# Altium PCB MiniCNC_ver2.PcbDoc (part 1 of 2)
Units mil, origin at the board's own origin, x right, y up, seen from the top; angles counter-clockwise.
Board outline 3937.01 x 3740 mil, 2 copper layers (Top Layer, Bottom Layer); 116 components, 92 nets, 444 pads, 109 vias.
Unrouted connection lines stored in the file: 92.
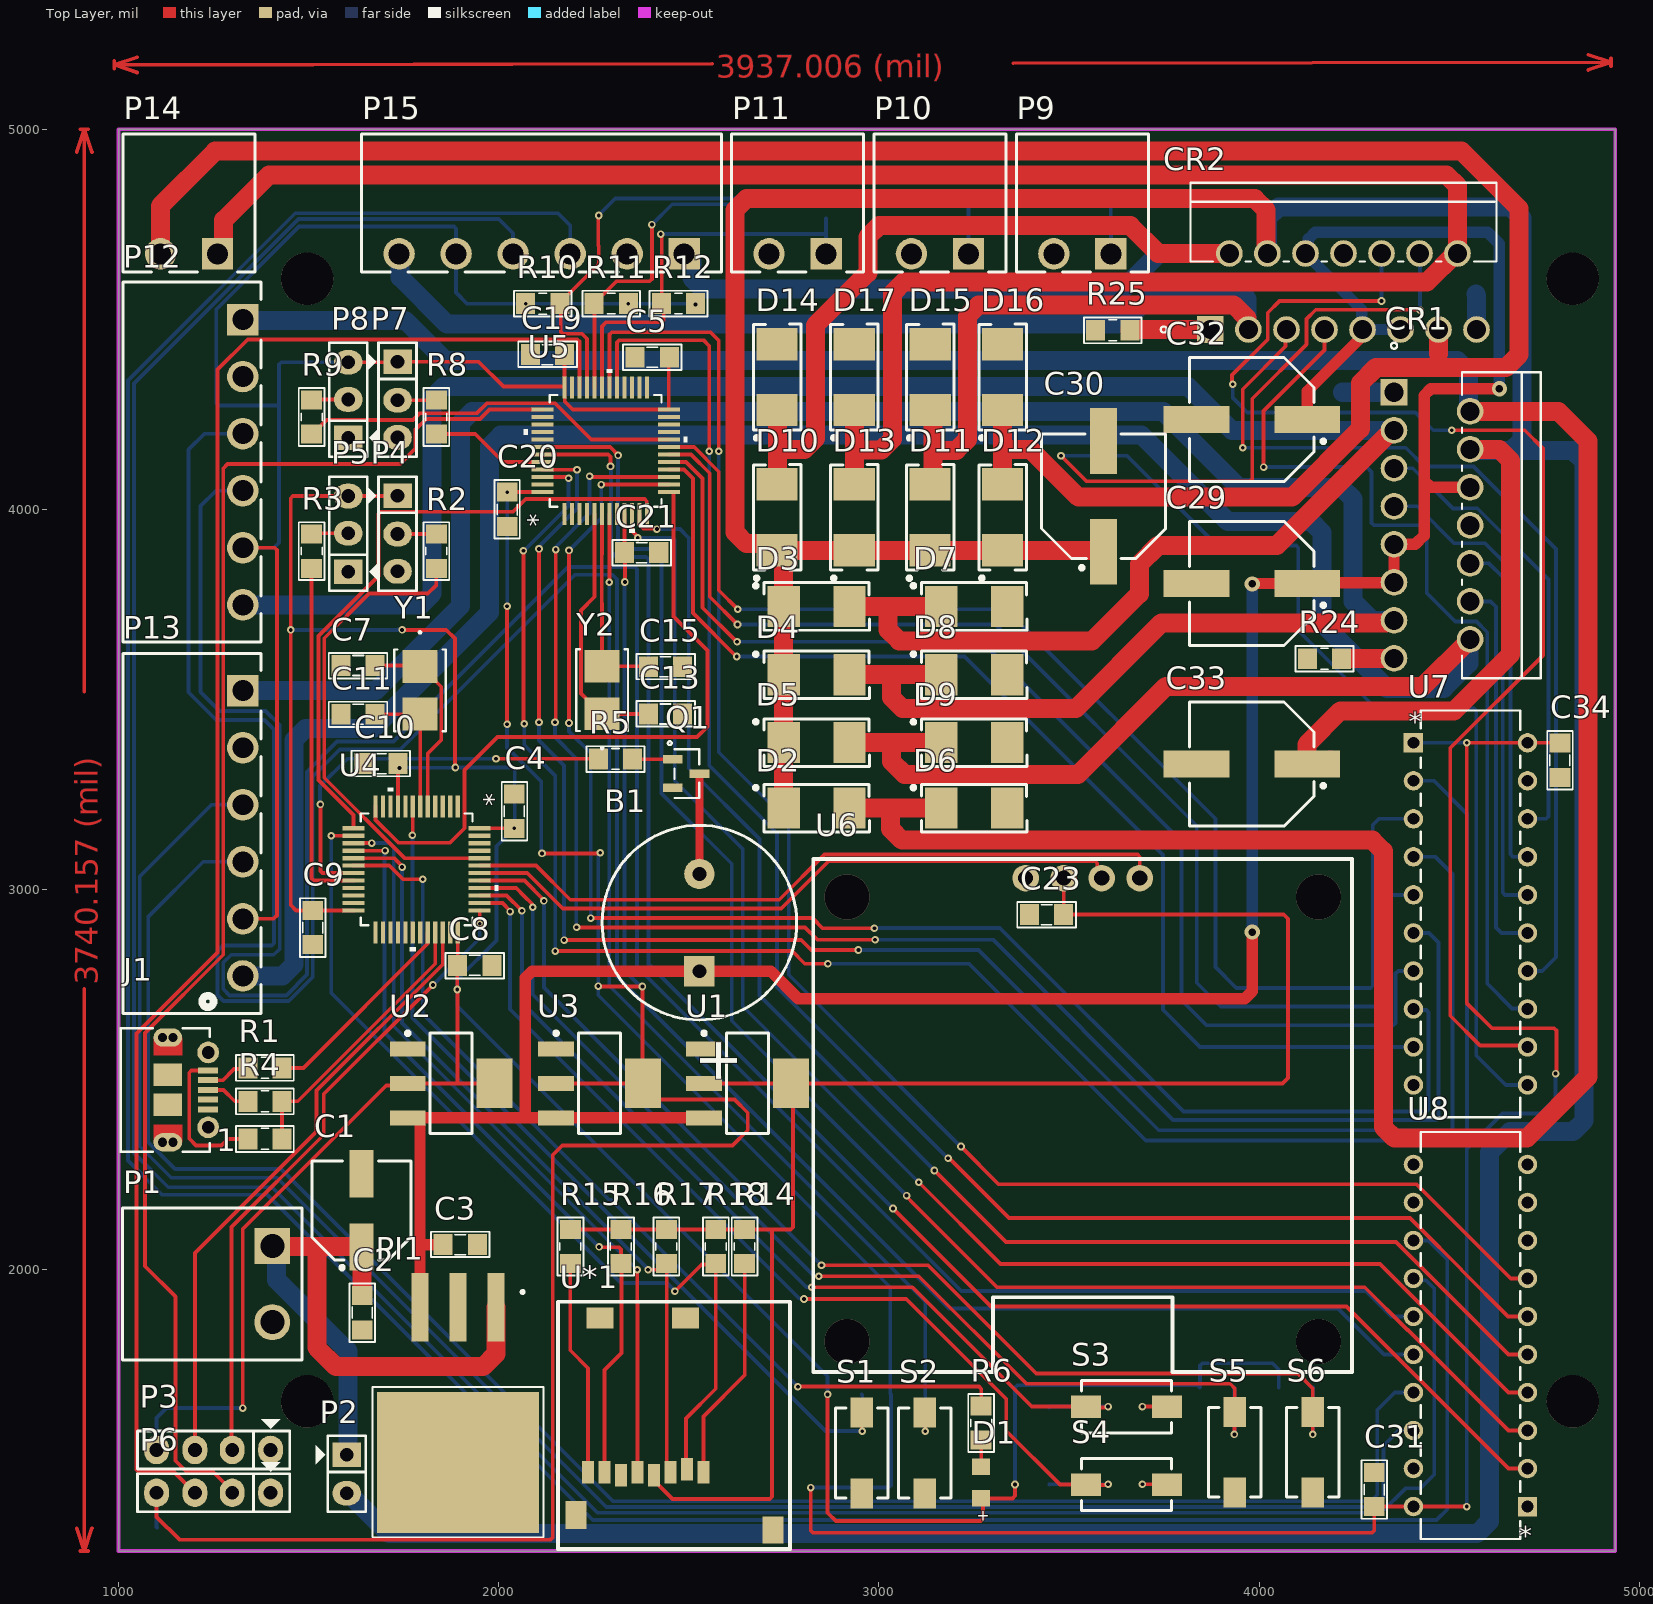
[diagram p0: Top Layer view]
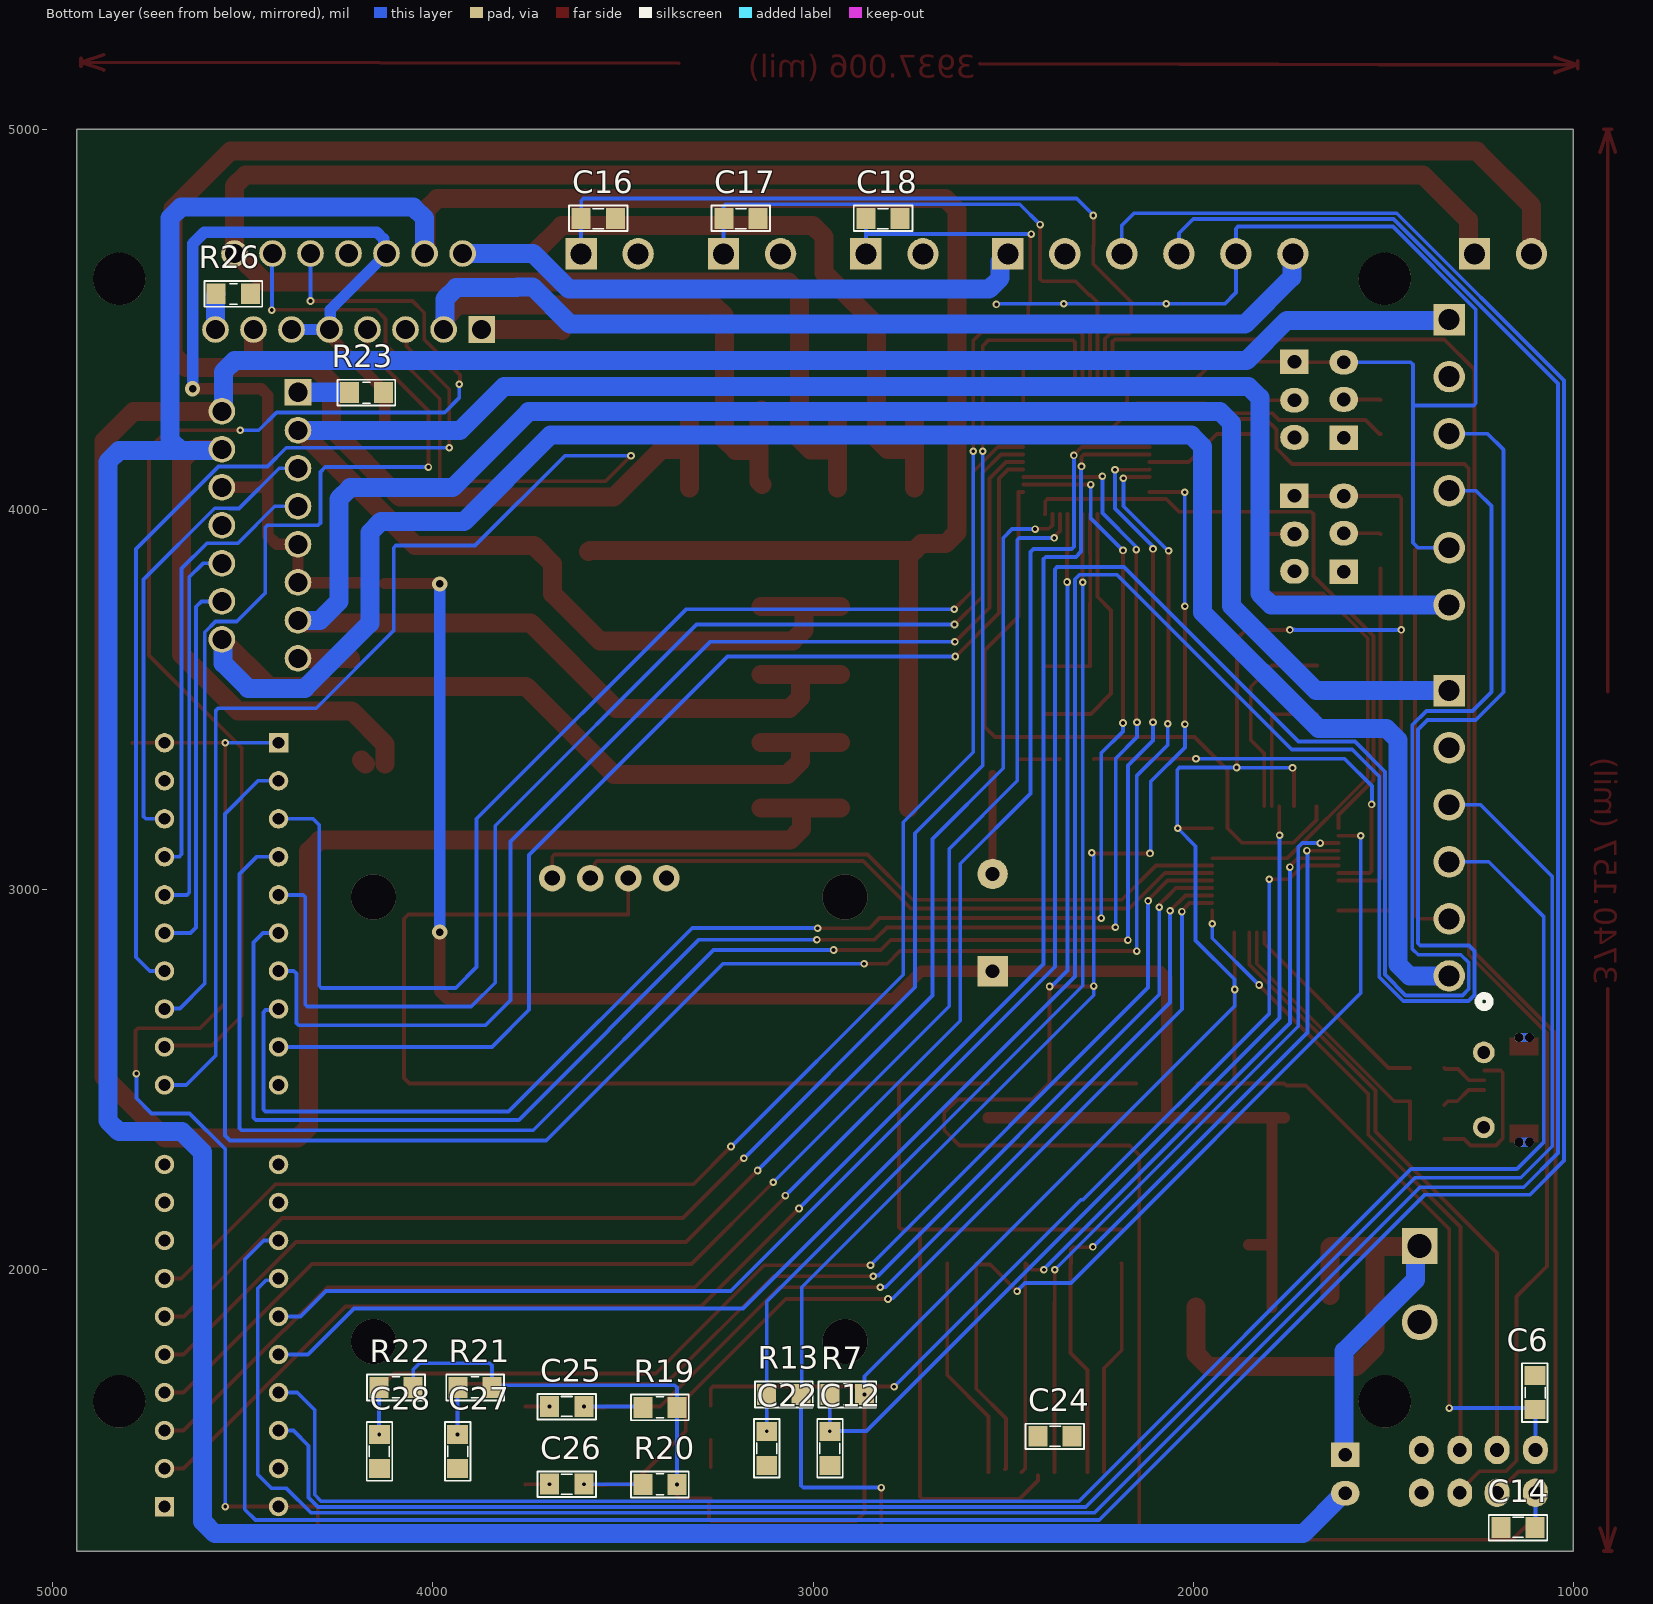
[diagram p1: Bottom Layer view, seen from below]
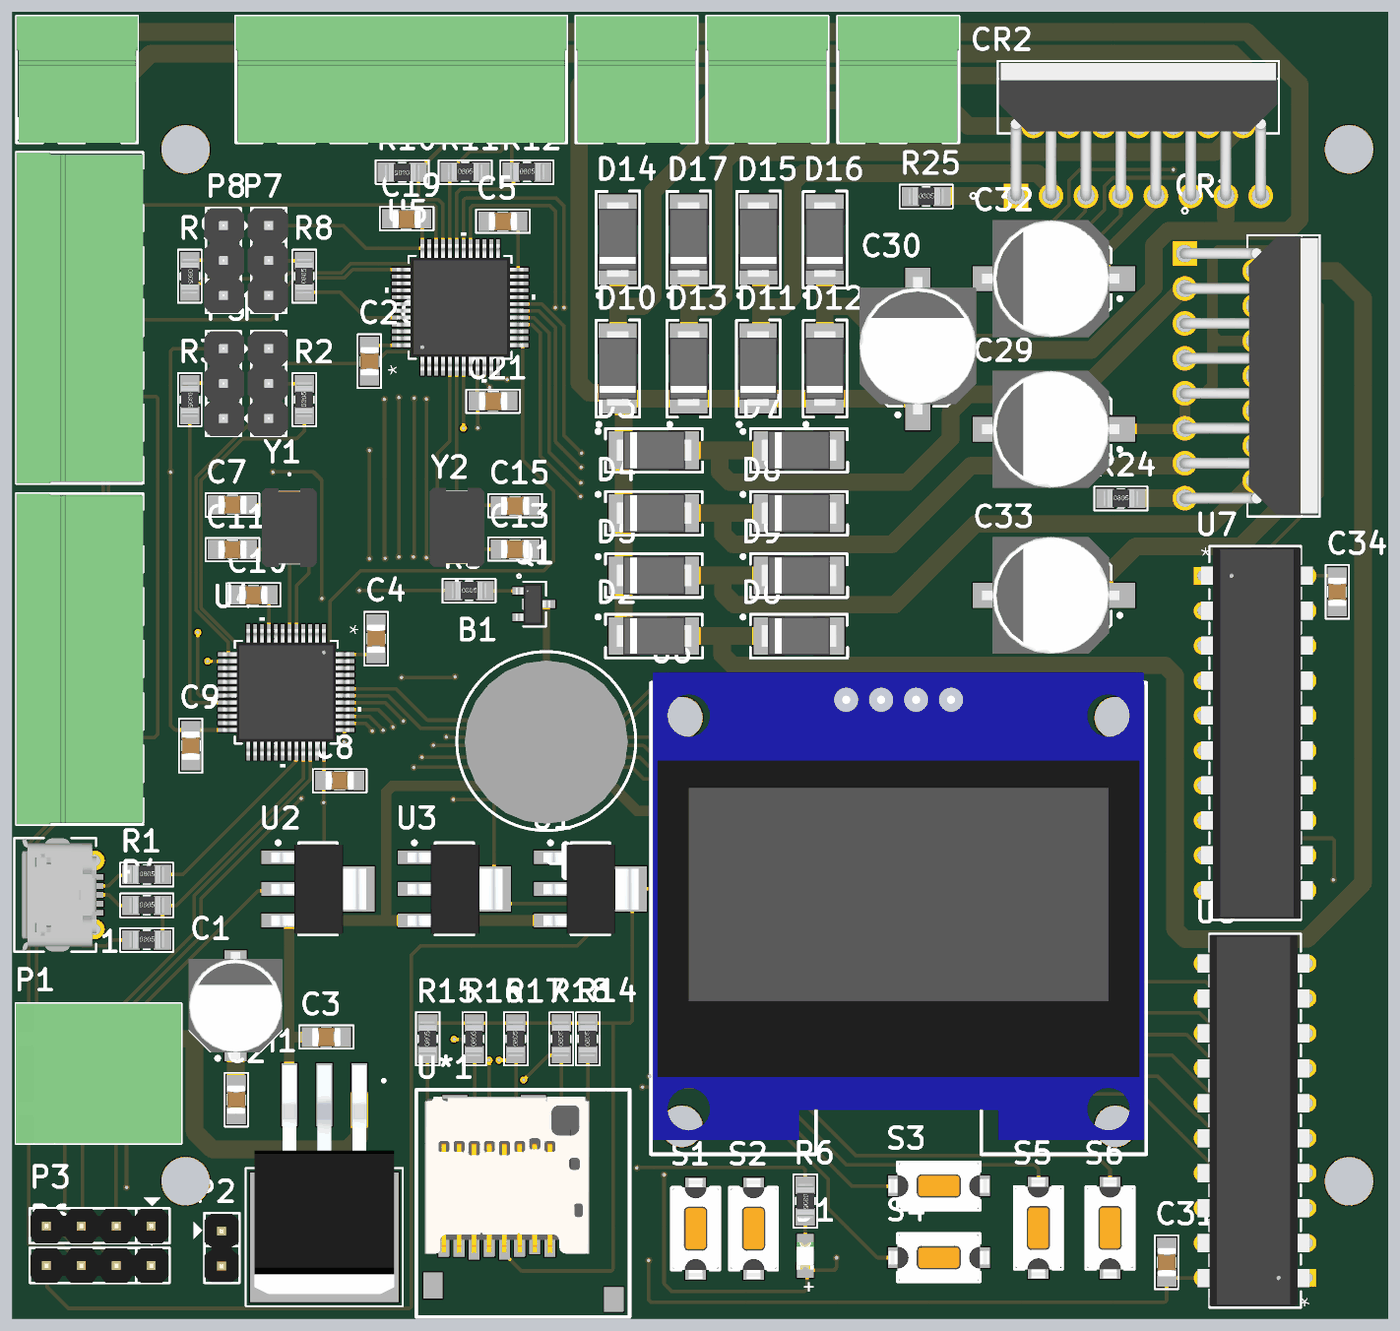
[diagram p2: 3D render of the assembled board from above, using the file's embedded part models]
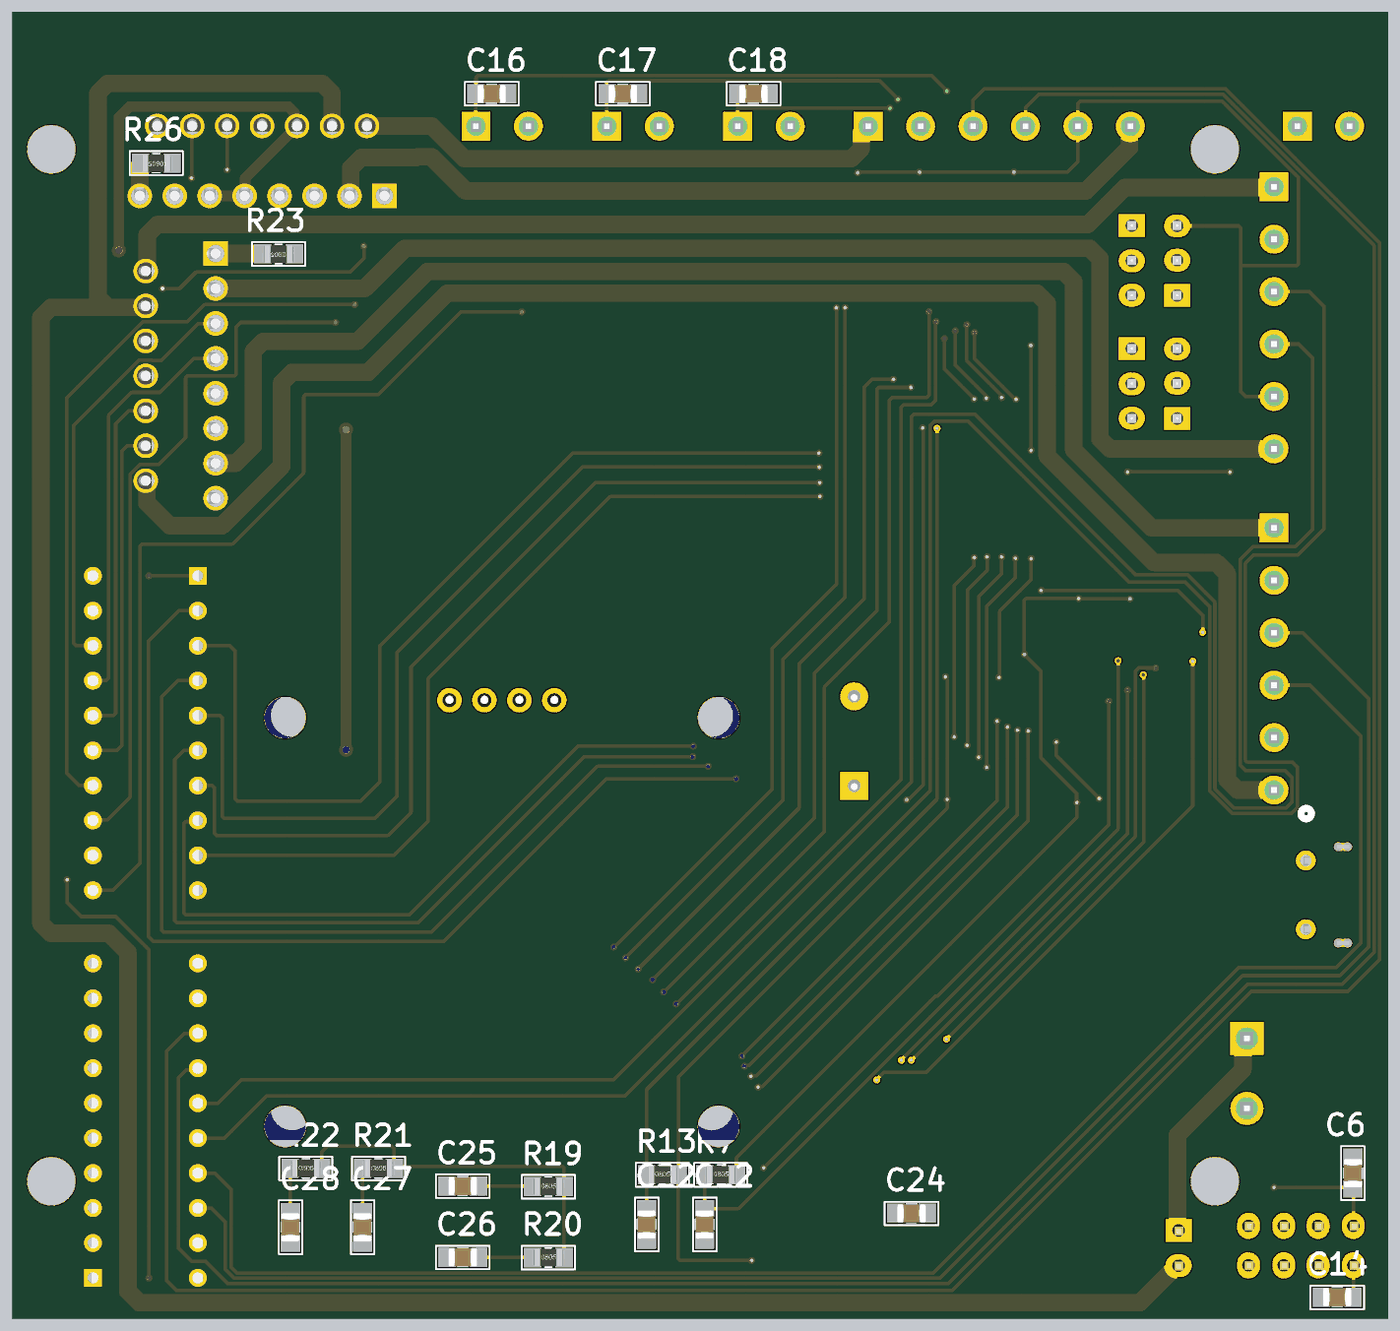
[diagram p3: 3D render of the assembled board from below, using the file's embedded part models]

## Layer stack, top to bottom
Top Solder: solder mask 0.4, Solder Resist, Dk 3.5
Top Layer: signal copper 1.4
Dielectric 1: dielectric 12.6, FR-4, Dk 4.8
Bottom Layer: signal copper 1.4
Bottom Solder: solder mask 0.4, Solder Resist, Dk 3.5

## Board outline
1000,1260 4937.01,1260 4937.01,5000 1000,5000

## Design rules (kind name [scope] priority, off if disabled: settings)
Clearance [All] p1: gap=5 ignorepadtopadclearanceinfootprint=FALSE
PolygonConnect [All] p1: connectstyle=Relief reliefconductorwidth=10 reliefentries=4 polygonreliefangle="90 Angle" airgapwidth=10
RoutingVias [All] p1: holewidth=10 width=20 viastyle="Through Hole" minholewidth=10 minwidth=20 maxholewidth=10 maxwidth=20
SolderMaskExpansion [All] p1: expansion=4 istentingtop=FALSE
Width [All] p1: maxlimit=50 minlimit=10 preferedwidth=30 minimp=50.000000 maximp=50.000000 favimp=50.000000
30 further rules are at their usual default settings.

## Classes and differential pairs
component class PowerSupply: C1 C2 C3 C4 C5 P1 P2 PI1 U1 U2 U3
component class Motor: C33 C34 CR1 CR2 D2 D3 D4 D5 D6 D7 D8 D9 D10 D11 D12 D13 D14 D15 D16 D17 P12 P13 P14 P15 R23 R24 R25 R26 U7 U8
component class MCU_Main: 1 B1 C7 C9 C11 C13 D1 J1 P3 P4 P5 Q1 R1 R2 R3 R4 R5 R6 R7 S1 U4 Y1
component class MCU_Control: C13 C33 C34 P6 P7 P8 P9 P10 P11 R8 R9 R10 R11 R12 R13 S2 U5 Y2
component class Control_Display_SD: C33 C34 R14 R15 R16 R17 R18 R19 R20 R21 R22 S3 S4 S5 S6 U6 U*1

## Components (designator, comment, footprint, x,y, rotation, side; value= is the part's Value field where it differs from the comment)
1 "Res-4.7K-0805" RES-SM-0805 1340,2344 r0 top value=4.7K
B1 "Buzzer" BUZZER 2528,2785.09 r90 top
C1 "Cap-Al-100uF-16V-D6L5" CAP-SM-AL-SIZE-D-D6L6 1639,2156 r90 top value=100uF/16V
C2 "Cap-10uF-50V-0805" CAP-SM-0805 1641,1842 r90 top value=10uF/50V
C3 "Cap-10uF-50V-0805" CAP-SM-0805 1944,2066 r180 top value=10uF/50V
C4 "Cap-10uF-50V-0805" CAP-SM-0805 2041,3161 r90 top value=10uF/50V
C5 "Cap-10uF-50V-0805" CAP-SM-0805 2449,4400 r180 top value=10uF/50V
C6 "Cap-10uF-50V-0805" CAP-SM-0805 1101,1722 r270 bottom value=10uF/50V
C7 "Cap-22pF-50V-0805" CAP-SM-0805 1585,3589 r0 top value=20pF/50V
C8 "Cap-100nF-50V-0805" CAP-SM-0805 1892,2800 r0 top value=100nF/50V
C9 "Cap-100nF-50V-0805" CAP-SM-0805 1511,2945 r270 top value=100nF/50V
C10 "Cap-100nF-50V-0805" CAP-SM-0805 1735,3331 r180 top value=100nF/50V
C11 "Cap-22pF-50V-0805" CAP-SM-0805 1585,3461 r0 top value=20pF/50V
C12 "Cap-100nF-50V-0805" CAP-SM-0805 2956,1485 r90 bottom value=100nF/50V
C13 "Cap-22pF-50V-0805" CAP-SM-0805 2484,3462 r180 top value=20pF/50V
C14 "Cap-10uF-50V-0805" CAP-SM-0805 1191,1322 r180 bottom value=10uF/50V
C15 "Cap-22pF-50V-0805" CAP-SM-0805 2484,3586 r180 top value=20pF/50V
C16 "Cap-100nF-50V-0805" CAP-SM-0805 3520,4765 r0 bottom value=100nF/50V
C17 "Cap-100nF-50V-0805" CAP-SM-0805 3145,4765 r0 bottom value=100nF/50V
C18 "Cap-100nF-50V-0805" CAP-SM-0805 2771,4765 r0 bottom value=100nF/50V
C19 "Cap-100nF-50V-0805" CAP-SM-0805 2173.5,4407 r180 top value=100nF/50V
C20 "Cap-100nF-50V-0805" CAP-SM-0805 2022.5,4045 r270 top value=100nF/50V
C21 "Cap-100nF-50V-0805" CAP-SM-0805 2331,3886 r0 top value=100nF/50V
C22 "Cap-100nF-50V-0805" CAP-SM-0805 3122,1485 r90 bottom value=100nF/50V
C23 "Cap-100nF-50V-0805" CAP-SM-0805 3396,2934 r0 top value=100nF/50V
C24 "Cap-100nF-50V-0805" CAP-SM-0805 2409,1562 r180 bottom value=100nF/50V
C25 "Cap-100nF-50V-0805" CAP-SM-0805 3693,1640 r180 bottom value=100nF/50V
C26 "Cap-100nF-50V-0805" CAP-SM-0805 3693,1436 r180 bottom value=100nF/50V
C27 "Cap-100nF-50V-0805" CAP-SM-0805 3935,1477 r90 bottom value=100nF/50V
C28 "Cap-100nF-50V-0805" CAP-SM-0805 4141,1477 r90 bottom value=100nF/50V
C29 "Cap-Al-220uF-35V-D8L10" CAP-SM-AL-SIZE-F-D8L10 3981,3805 r180 top value=220uF/35V
C30 "Cap-Al-220uF-35V-D8L10" CAP-SM-AL-SIZE-F-D8L10 3591,4034.33 r90 top value=220uF/35V
C31 "Cap-100nF-50V-0805" CAP-SM-0805 4303,1467 r270 top value=100nF/50V
C32 "Cap-Al-220uF-35V-D8L10" CAP-SM-AL-SIZE-F-D8L10 3981,4236 r180 top value=220uF/35V
C33 "Cap-Al-220uF-35V-D8L10" CAP-SM-AL-SIZE-F-D8L10 3981,3330 r180 top value=220uF/35V
C34 "Cap-100nF-50V-0805" CAP-SM-0805 4791,3295 r90 top value=100nF/50V
CR1 "L298N" Multiwatt15_V_STM 4355,4308 r270 top
CR2 "L298N" Multiwatt15_V_STM 3872,4473 r0 top
D1 "Super Red, 1.9V" WL-SMCW_0805 3269,1440 r270 top
D2 "SS24" SS24 2836.28,3214 r0 top
D3 "SS24" SS24 2836.28,3745 r0 top
D4 "SS24" SS24 2836.28,3565 r0 top
D5 "SS24" SS24 2836.28,3387 r0 top
D6 "SS24" SS24 3250.91,3214 r0 top
D7 "SS24" SS24 3250.91,3745 r0 top
D8 "SS24" SS24 3250.91,3565 r0 top
D9 "SS24" SS24 3250.91,3387 r0 top
D10 "SS24" SS24 2732.38,3979 r90 top
D11 "SS24" SS24 3134.13,3979 r90 top
D12 "SS24" SS24 3325,3979 r90 top
D13 "SS24" SS24 2935.25,3979 r90 top
D14 "SS24" SS24 2732.38,4347.91 r90 top
D15 "SS24" SS24 3135.13,4347.91 r90 top
D16 "SS24" SS24 3325,4347.91 r90 top
D17 "SS24" SS24 2935.25,4347.91 r90 top
J1 "105017-0001" Micro-USB-Female 1123,2473 r270 top
P1 "691312510002" 691312510002 1247,1962 r270 top
P2 "Header 2" JP2 1600,1513 r270 top
P3 "Header 4" JP4 1300,1526 r180 top
P4 "Header 3" JP3 1734,3936 r270 top
P5 "Header 3" JP3 1604,3936 r90 top
P6 "Header 4" JP4 1300,1413 r180 top
P7 "Header 3" JP3 1734,4288 r270 top
P8 "Header 3" JP3 1604,4288 r90 top
P9 "691322310002" 691322310002 3535.21,4806 r180 top
P10 "691322310002" 691322310002 3160.63,4806 r180 top
P11 "691322310002" 691322310002 2786.05,4806 r180 top
P12 "691322310006" 691322310006 1193.14,4124 r270 top
P13 "691322310006" 691322310006 1193.14,3148 r270 top
P14 "691322310002" 691322310002 1185.47,4806 r180 top
P15 "691322310006" 691322310006 2113,4806 r180 top
PI1 "L7805-SMD" TO254P1435X464-4N 1993,1901.46 r180 top
Q1 "C1815" SOT23_NEX 2495,3305 r270 top
R1 "Res-270-0805" RES-SM-0805 1340,2531 r0 top value=20
R2 "Res-100K-0805" RES-SM-0805 1836,3845 r90 top value=100K
R3 "Res-100K-0805" RES-SM-0805 1508,3935 r270 top value=100K
R4 "Res-270-0805" RES-SM-0805 1340,2443 r0 top value=20
R5 "Res-15K-0805" RES-SM-0805 2262,3343 r0 top value=15K
R6 "Res-1K-0805" RES-SM-0805 3269,1642 r270 top value=1K
R7 "Res-10k-0805" RES-SM-0805 2955,1672 r180 bottom value=10K
R8 "Res-100K-0805" RES-SM-0805 1836,4198 r90 top value=100K
R9 "Res-100K-0805" RES-SM-0805 1508,4288 r270 top value=100K
R10 "Res-10k-0805" RES-SM-0805 2161,4541 r180 top value=10K
R11 "Res-10k-0805" RES-SM-0805 2251,4541 r0 top value=10K
R12 "Res-10k-0805" RES-SM-0805 2428,4541 r0 top value=10K
R13 "Res-10k-0805" RES-SM-0805 3122,1672 r180 bottom value=10K
R14 "Res-47K-0805" RES-SM-0805 2647,2016 r90 top value=47K
R15 "Res-47K-0805" RES-SM-0805 2189,2016 r90 top value=47K
R16 "Res-47K-0805" RES-SM-0805 2322,2016 r90 top value=47K
R17 "Res-47K-0805" RES-SM-0805 2441,2016 r90 top value=47K
R18 "Res-47K-0805" RES-SM-0805 2571,2016 r90 top value=47K
R19 "Res-10k-0805" RES-SM-0805 3448,1638 r180 bottom value=10K
R20 "Res-10k-0805" RES-SM-0805 3448,1435 r180 bottom value=10K
R21 "Res-10k-0805" RES-SM-0805 3934,1690 r180 bottom value=10K
R22 "Res-10k-0805" RES-SM-0805 4142,1690 r180 bottom value=10K
R23 "Res-0-0805" RES-SM-0805 4130,4307 r0 bottom value=0.5
R24 "Res-0-0805" RES-SM-0805 4127,3607 r0 top value=0.5
R25 "Res-0-0805" RES-SM-0805 3570,4471 r0 top value=0.5
R26 "Res-0-0805" RES-SM-0805 4480,4567 r0 bottom value=0.5
S1 "434113043826" 434113043826 2955.33,1518 r90 top
S2 "434113043826" 434113043826 3121,1518 r90 top
S3 "434113043826" 434113043826 3651,1640 r180 top
S4 "434113043826" 434113043826 3651,1435 r180 top
S5 "434113043826" 434113043826 3936,1520 r90 top
S6 "434113043826" 434113043826 4141,1520 r90 top
U1 "AMS1117" SOT223 2654.17,2490.21 r0 top
U2 "AMS1117" SOT223 1875,2490.21 r0 top
U3 "AMS1117" SOT223 2265,2490.21 r0 top
U4 "STM32F103C8T6" LQFP-48 1784,3053 r270 top
U5 "STM32F103C8T6" LQFP-48 2281.5,4154 r90 top
U6 "LCD_OLED" LCD_OLED 3536,3030 r270 top
U7 "74HC245N" 74HC245N 4406,3386 r0 top
U8 "74HC245N" 74HC245N 4706,1377 r180 top
U*1 "SD_Connect" SD_CONNECT 2721.38,1315.55 r180 top
Y1 "8MHz" xtal2_CX5032GB_AVX-L 1793,3524 r270 top
Y2 "8MHz" xtal2_CX5032GB_AVX-L 2272.2,3524.74 r90 top

## Footprints (in the part's own frame and the unit in brackets; to place one, negate y for a bottom-side part, rotate by r counter-clockwise, add the part's x,y. Pads: shape width x height; smd on the part's side, far side on the other; paste and mask are expansions set on the pad)
74HC245N [mil]
  rect 51x51 hole 31 mask+0: 1(0,0)
  round 51 hole 31 mask+0: 2(0,-100) 3(0,-200) 4(0,-300) 5(0,-400) 6(0,-500) 7(0,-600) 8(0,-700) 9(0,-800) 10(0,-900) 11(300,-900) 12(300,-800) 13(300,-700) 14(300,-600) 15(300,-500) 16(300,-400) 17(300,-300) 18(300,-200) 19(300,-100) 20(300,0)
  silkscreen extent 19,-985 281,85, body extent -5,-980 315,80, height 170
434113043826 [mm] "SMD Tact Switch, body 6x3.5mm"
  rect 2x1.5 smd: 1(-2.7,0) 2(2.7,0)
  silkscreen extent -3,-1.75 3,1.75, body extent -3.65,-1.75 3.65,1.75, height 4.3
691312510002 [mm] "5,08mm - PCB Headers - Horizontal - Opened ends - 02p"
  rect 2.4x2.4 hole 1.6: 1(-2.54,4)
  round 2.4 hole 1.6: 2(2.54,4)
  silkscreen extent -5.08,-6 5.08,6, body extent -5.08,-6 5.08,6, height 8.55
691322310002 [mm] "Horizontal PCB Header, pitch 3.81mm, 02p"
  rect 2.1x2.1 hole 1.4: 1(-1.905,3.4)
  round 2.1 hole 1.4: 2(1.905,3.4)
  silkscreen extent -4.4,-4.6 4.41,4.6, body extent -4.4,-4.6 4.41,4.6, height 7.25
691322310006 [mm] "Horizontal PCB Header, pitch 3.81mm, 06p"
  rect 2.1x2.1 hole 1.4: 1(-9.525,3.4)
  round 2.1 hole 1.4: 2(-5.715,3.4) 3(-1.905,3.4) 4(1.905,3.4) 5(5.715,3.4) 6(9.525,3.4)
  silkscreen extent -12.02,-4.6 12.03,4.6, body extent -12.02,-4.6 12.02,4.6, height 7.25
BUZZER [mil]
  rect 80x80 hole 36: 1(0,0)
  round 80 hole 36: 2(255.91,0)
  silkscreen extent -128,-256 384,256, body extent -108,-233 358,233, height 226
CAP-SM-0805 [mil]
  rect 50x55 smd: 1(0,0) 2(90,0)
  silkscreen extent -32,-34 122,33, body extent 4,-27 86,27, height 30
CAP-SM-AL-SIZE-D-D6L6 [mm] "WH6.6"
  rect 3.15x1.6 smd: 1(-2.45,0) 2(2.45,0)
  silkscreen extent -3.95,-3.3 3.3,3.3, body extent -3.9,-3.4 3.9,3.4, height 5.7
CAP-SM-AL-SIZE-F-D8L10 [mm] "WH8.3"
  rect 4.4x1.8 smd: 1(-3.7,0) 2(3.7,0)
  silkscreen extent -4.9,-4.15 4.15,4.15, body extent -4.75,-4.25 5.25,4.25, height 10.2
JP2 [mil]
  rect 65x75 hole 36: 1(0,0)
  oval 65x75 hole 36: 2(101,0)
  silkscreen extent -50,-81 150,50, body extent -48,-50 148,48, height 323
JP3 [mil] "Jumper 3"
  rect 65x75 hole 36: 1(-100,0)
  oval 65x75 hole 36: 2(1,0) 3(99,0)
  silkscreen extent -150,-81 150,50, body extent -150,-60 150,55, height 355
JP4 [mil] "Jumper 4"
  oval 65x75 hole 36: 1(-100,0) 2(1,0) 3(99,0) 4(200,0)
  silkscreen extent -150,-81 250,50, body extent -148,-48 248,50, height 323
LCD_OLED [mil]
  round 70 hole 40: 1(0,-150) 2(0,-50) 3(0,50) 4(0,150)
  silkscreen extent -50,-709 1299,709, body extent -80,-703 1259,703, height 350
LQFP-48 [mil]
  rect 58x11 smd: 1(-166,108.27) 2(-166,88.58) 3(-166,68.9) 4(-166,49.21) 5(-166,29.53) 6(-166,9.84) 7(-166,-9.84) 8(-166,-29.53) 9(-166,-49.21) 10(-166,-68.9) 11(-166,-88.58) 12(-166,-108.27) 25(166,-108.27) 26(166,-88.58) 27(166,-68.9) 28(166,-49.21) 29(166,-29.53) 30(166,-9.84) 31(166,9.84) 32(166,29.53) 33(166,49.21) 34(166,68.9) 35(166,88.58) 36(166,108.27)
  rect 11x58 smd: 13(-108.27,-166) 14(-88.58,-166) 15(-68.9,-166) 16(-49.21,-166) 17(-29.53,-166) 18(-9.84,-166) 19(9.84,-166) 20(29.53,-166) 21(49.21,-166) 22(68.9,-166) 23(88.58,-166) 24(108.27,-166) 37(108.27,166) 38(88.58,166) 39(68.9,166) 40(49.21,166) 41(29.53,166) 42(9.84,166) 43(-9.84,166) 44(-29.53,166) 45(-49.21,166) 46(-68.9,166) 47(-88.58,166) 48(-108.27,166)
  silkscreen extent -215,-215 215,215, body extent -181,-181 181,181, height 63
Micro-USB-Female [mil]
  rect 16x53 smd: 1(-51.18,112) 2(-25.59,112) 3(0,112) 4(25.59,112) 5(51.18,112)
  round 57 hole 33: 6(-98.43,112.98) 7(98.43,112.98)
  rect 59x75 smd: 10(-39.37,6.68) 11(39.37,6.68)
  oval 48x75 smd mask+0: S_1(-137.8,6.68) S_2(137.8,6.68)
  round 24 hole 24: S_1_H1(-137.8,20.18) S_1_H2(-137.8,-6.82) S_2_H1(137.8,20.18) S_2_H2(137.8,-6.82)
  Top Layer region: -91.8,-30.82 -91.8,44.18 -137.8,44.18 -137.8,-30.82
  Top Layer region: 91.8,-30.82 91.8,44.18 137.8,44.18 137.8,-30.82
  Multi-Layer lines w24: 137.8,-6.82 137.8,20.18 ; -137.8,-6.82 -137.8,20.18
  silkscreen extent -247,-117 163,127, body extent -161,-95 161,118, height 108
Multiwatt15_V_STM [mil]
  rect 70x70 hole 50 mask+0: 1(0,0)
  round 70 hole 50 mask+0: 2(50,200) 3(100,0) 4(150,200) 5(200,0) 6(250,200) 7(300,0) 8(350,200) 9(400,0) 10(450,200) 11(500,0) 12(550,200) 13(600,0) 14(650,200) 15(700,0)
  silkscreen extent -130,-8 752,386, body extent -48,-15 748,381, height 945
RES-SM-0805 [mil]
  rect 50x55 smd: 1(0,0) 2(90,0)
  silkscreen extent -31,-34 121,34, body extent -5,-24 95,25, height 20
SD_CONNECT [mm]
  rect 0.8x1.5 smd: 1(4.65,-3.85) 2(5.75,-4.05) 3(6.85,-3.85) 4(7.95,-3.65) 5(9.05,-3.85) 6(10.15,-3.65) 7(11.25,-3.85) 8(12.35,-3.85)
  rect 1.8x1.4 smd: 9(11.55,-14.15) 10(5.85,-14.15)
  rect 1.4x1.778 smd: 11(0,0)
  rect 1.4x1.9 smd: 11(13.15,-1)
  silkscreen extent -1.14,-15.24 14.35,1.27, body extent 1.77,-14.73 13.72,-3.33, height 1.43
SOT23_NEX [mil]
  rect 22x52 smd paste+0 mask+4: 1(-37.5,-37.21) 2(37.5,-37.21) 3(0,33.36)
  silkscreen extent -85,-50 64,33, body extent -59,-54 59,44, height 43
SOT223 [mm] "SOT223, 4-Leads, Body 6.5x3.5mm, Pitch 2.3mm, Lead Span 7mm, IPC Medium Density"
  rect 2.4x1 smd: 1(-2.9,2.3) 2(-2.9,0) 3(-2.9,-2.3)
  rect 2.4x3.3 smd: 4(2.9,0)
  silkscreen extent -3.02,-3.35 1.4,3.47, body extent -3.39,-3.27 3.5,3.23, height 1.72
SS24 [mil] "DO-214-AC/SMA Molded Diode, Body 5.3x2.6mm, IPC Medium Density"
  rect 85x108 smd: 1(-86.61,0) 2(86.61,0)
  silkscreen extent -165,-63 139,62, body extent -108,-55 108,55, height 91
TO254P1435X464-4N [mm]
  rect 1.15x4.6 smd: 1(0,0) 2(2.54,0) 3(5.08,0)
  rect 10.8x9.4 smd: 4(2.54,10.375)
  silkscreen extent -3.17,-1.12 8.25,15.37, body extent -2.54,-2.16 7.62,14.49, height 4.44
WL-SMCW_0805 [mm] "SMD Mono-color Chip LED, body 2.0x1.25mm"
  rect 1.1x1.2 smd: 1(-1.05,0) 2(1.05,0)
  body extent -1,-0.63 1,0.62, height 0.7
xtal2_CX5032GB_AVX-L [mil]
  rect 86x92 smd paste+0 mask+0: 1(-62.5,0) 2(62.5,0)
  silkscreen extent -155,-68 108,68, body extent -113,-78 113,78, height 43

## Part data
1: "RES SMD 4.7K OHM 5% 1/8W 0805", Manufacturer=Yageo, Manufacturer Part Number=RC0805JR-074K7L, Supplier 1 Part Number=311-4.7KARCT-ND, Local Supplier=thegioiic, Local Supplier Link=https://www.thegioiic.com/products/dien-tro-4-7-kohm-0805-5, Supplier 1=Digikey, Supplier 1 Link=https://www.digikey.com/product-detail/en/yageo/RC0805JR-074K7L/311-4.7KARCT-ND/731274
B1: Local Supplier Part Number="1209 DIP Buzzer 12x9mm", Local Supplier=thegioiic, Local Supplier Link=https://www.thegioiic.com/products/1209-dip-buzzer-12x9mm
C1: "CAP ALUM 100UF 20% 16V SMD", Manufacturer=Nichicon, Manufacturer Part Number=UWX1C101MCL1GB, Supplier 1 Part Number=493-2105-1-ND, Local Supplier=thegioiic, Local Supplier Link=https://www.thegioiic.com/products/tu-nhom-smd-100uf-16v-6-3x5-4mm, Supplier 1=Digikey, Supplier 1 Link=https://www.digikey.com/product-detail/en/nichicon/UWX1C101MCL1GB/493-2105-1-ND/590080
C2 C3 C4 C5 C6 C14: "CAP CER 10UF 50V X5R 0805", Manufacturer=Yageo, Manufacturer Part Number=CC0805KKX5R9BB106, Supplier 1 Part Number=311-3499-2-ND, Local Supplier=thegioiic, Local Supplier Link=https://www.thegioiic.com/products/tu-gom-0805-10uf-50v, Supplier 1=Digikey, Supplier 1 Link=https://www.digikey.com/product-detail/en/yageo/CC0805KKX5R9BB106/311-3499-2-ND/7164383
C7 C11 C13 C15: "CAP CER 22PF 100V X7R 0805", Manufacturer="Johanson Dielectrics Inc.", Manufacturer Part Number=101X15W102MV4E, Supplier 1 Part Number=709-1335-1-ND, Local Supplier=thegioiic, Local Supplier Link=https://thegioiic.com/products/tu-1nf-50v-0805, Supplier 1=Digikey, Supplier 1 Link=https://www.digikey.com/product-detail/en/johanson-dielectrics-inc/101X15W102MV4E/709-1335-1-ND/2327235
C8 C9 C10 C12 C16 C17 C18 C19 C20 C21 C22 C23 C24 C25 C26 C27 C28 C31 C34: "CAP CER 0.1UF 50V Y5V 0805", Manufacturer="Samsung Electro-Mechanics", Manufacturer Part Number=CL21F104ZBCNNNC, Supplier 1 Part Number=1276-1007-1-ND, Local Supplier=thegioiic, Local Supplier Link=https://www.thegioiic.com/products/tu-gom-0805-100nf-0-1uf-50v, Supplier 1=Digikey, Supplier 1 Link=https://www.digikey.com/product-detail/en/samsung-electro-mechanics/CL21F104ZBCNNNC/1276-1007-1-ND/3889093
C29 C30 C32 C33: "CAP ALUM 220UF 20% 35V SMD", Manufacturer=Nichicon, Manufacturer Part Number=UWT1V221MNL1GS, Supplier 1 Part Number=493-2205-2-ND, Local Supplier=thegioiic, Local Supplier Link=https://thegioiic.com/products/tu-nhom-smd-220uf-35v-d8l10, Supplier 1=Digikey, Supplier 1 Link=https://www.digikey.com/product-detail/en/nichicon/UWT1V221MNL1GS/493-2205-2-ND/589946
CR1 CR2: "No Description Available", Mfr_Name=STMicroelectronics, Copyright="Copyright (C) 2023 Ultra Librarian. All rights reserved.", Manufacturer_Part_Number=L298N, RefDes=RefDes, Type=DEV
D1: library part 150080SS75000, "WL-SMCW SMT Mono-color Chip LED Waterclear, size 0805, Super Red, 1.9V, 140deg", Emitting Color="Super Red", Forward Voltage typ.=1.9V, Operating Temperature="-40 to +85degC", Chip Technology=AlInGaP, ComponentLink1Description=Manufacturer, ComponentLink1URL=http://www.we-online.de, ComponentLink2Description=Datasheet, ComponentLink2URL=https://www.we-online.com/catalog/datasheet/150080SS75000.pdf, Dominant Wavelength typ.=630nm, Luminous Intensity typ.=60mcd, Mounting Technology=SMT, Packaging="Tape and Reel", Part Number=150080SS75000, Peak Wavelength typ.=645nm, Published Date="December 2019", Publisher="Wurth Elektronik", Size=0805, Viewing Angle=140deg
D2 D3 D4 D5 D6 D7 D8 D9 D10 D11 D12 D13 D14 D15 D16 D17: library part Diode-SS24, "DIODE SCHOTTKY 40V 2A DO214AA", Manufacturer="ON Semiconductor", Supplier 1 Part Number=SS24FSCT-ND, Local Supplier=thegioiic, Local Supplier Link=https://thegioiic.com/products/ss24-smb, Manufacturer Part Number=SS24, Supplier 1=Digikey, Supplier 1 Link=https://www.digikey.com/product-detail/en/on-semiconductor/SS24/SS24FSCT-ND/1626273
J1: library part Micro-USB-Female, "CONN RCPT USB2.0 MICRO B SMD R/A", Local Supplier Part Number=x, Built_By=EMA_Cory, Copyright="Copyright (C) 2018 Accelerated Designs. All rights reserved", Datasheet=https://www.molex.com/pdm_docs/sd/1050170001_sd.pdf, Local Supplier=thegioiic, Local Supplier Link=https://www.thegioiic.com/products/cong-usb-micro-b-2-0-dau-cai-5-chan-smd-v1, Manufacturer_Part_Number=105017-0001, RefDes=RefDes, SourceLibrary=Molex_2020-05-26, Type=DEV, Vendor="Molex Connector Corporation"
P1: "WR-TBL Serie 312 Open Horizontal PCB Header, Pluggable, pitch 5.08mm, 2p", Operating Temperature="-40 to +105degC", Rated Current [UL]=20A, Working Voltage [UL]=300VAC, Application=Pluggable, Compliance=RoHS, ComponentLink1Description=Manufacturer, ComponentLink1URL=http://www.we-online.de, ComponentLink2Description=Datasheet, ComponentLink2URL=https://katalog.we-online.de/em/datasheet/691312510002.pdf, Modularity=No, Mounting Technology=THT, Packaging=Box, Part Number=691312510002, PCB/Cable/Panel=PCB, Pin Number=2, Pitch=5.08mm, Published Date="October 2019", Publisher="Wurth Elektronik", Type=Horizontal
P2: "Header, 2-Pin", Local Supplier Part Number=x, LatestRevisionDate=17-Jul-2002, LatestRevisionNote="Re-released for DXP Platform.", Local Supplier=thegioiic, Local Supplier Link=https://www.thegioiic.com/products/hang-rao-duc-don-2-54mm-40-chan-1-hang-cao-11-4mm-xuyen-lo, Publisher="Altium Limited"
P3 P6: "Header, 4-Pin", Local Supplier Part Number=x, LatestRevisionDate=17-Jul-2002, LatestRevisionNote="Re-released for DXP Platform.", Local Supplier=thegioiic, Local Supplier Link=https://www.thegioiic.com/products/hang-rao-duc-don-2-54mm-40-chan-1-hang-cao-11-4mm-xuyen-lo, Publisher="Altium Limited"
P4 P5 P7 P8: "Header, 3-Pin", Local Supplier Part Number=x, LatestRevisionDate=17-Jul-2002, LatestRevisionNote="Re-released for DXP Platform.", Local Supplier=thegioiic, Local Supplier Link=https://www.thegioiic.com/products/hang-rao-duc-don-2-54mm-40-chan-1-hang-cao-11-4mm-xuyen-lo, Publisher="Altium Limited"
P9 P10 P11 P14: "WR-TBL Serie 322 Horizontal PCB Header, Pluggable, pitch 3.81mm, 2p", Operating Temperature="-40 to +105degC", Rated Current [UL]=10A, Working Voltage [UL]=300VAC, Application=Pluggable, Compliance=RoHS, ComponentLink1Description=Manufacturer, ComponentLink1URL=http://www.we-online.de, ComponentLink2Description=Datasheet, ComponentLink2URL=https://katalog.we-online.de/em/datasheet/691322310002.pdf, Modularity=No, Mounting Technology=THT, Packaging=Box, Part Number=691322310002, PCB/Cable/Panel=PCB, Pin Number=2, Pitch=3.81mm, Published Date="October 2019", Publisher="Wurth Elektronik", Type=Horizontal
P12 P13 P15: "WR-TBL Serie 322 Horizontal PCB Header, Pluggable, pitch 3.81mm, 6p", Operating Temperature="-40 to +105degC", Rated Current [UL]=10A, Working Voltage [UL]=300VAC, Application=Pluggable, Compliance=RoHS, ComponentLink1Description=Manufacturer, ComponentLink1URL=http://www.we-online.de, ComponentLink2Description=Datasheet, ComponentLink2URL=https://katalog.we-online.de/em/datasheet/691322310006.pdf, Modularity=No, Mounting Technology=THT, Packaging=Box, Part Number=691322310006, PCB/Cable/Panel=PCB, Pin Number=6, Pitch=3.81mm, Published Date="October 2019", Publisher="Wurth Elektronik", Type=Horizontal
R1 R4: "RES SMD 270 OHM 0.1% 0.15W 0705", Manufacturer="Vishay Dale", Manufacturer Part Number=M55342E06B270ART5, Supplier 1 Part Number=1135-1723-6-ND, Local Supplier=thegioiic, Local Supplier Link=https://thegioiic.com/products/dien-tro-270-ohm-0805-5, Supplier 1=Digikey, Supplier 1 Link=https://www.digikey.com/product-detail/en/vishay-dale/M55342E06B270ART5/1135-1723-6-ND/3197905
R2 R3 R8 R9 R23 R24 R25 R26: "RES 0 OHM JUMPER 0805", Manufacturer="Vishay Dale", Manufacturer Part Number=WSL080500000ZEA9, Supplier 1 Part Number=541-3928-1-ND, Local Supplier=thegioiic, Supplier 1=Digikey, Supplier 1 Link=https://www.digikey.com/product-detail/en/vishay-dale/WSL080500000ZEA9/541-3928-1-ND/7423223
  R2 R3 R8 R9: Local Supplier Link=https://www.thegioiic.com/products/dien-tro-100-kohm-0805-5
  R23 R24 R25 R26: Local Supplier Link=https://thegioiic.com/products/dien-tro-0-ohm-0805-5
R5: "RES 15K OHM 1% 1/4W 0805", Manufacturer="TE Connectivity Passive Product", Manufacturer Part Number=CRGCQ0805F15K, Supplier 1 Part Number=A129763CT-ND, Local Supplier=thegioiic, Local Supplier Link=https://www.thegioiic.com/products/dien-tro-15-kohm-0805-5, Supplier 1=Digikey, Supplier 1 Link=https://www.digikey.com/product-detail/en/te-connectivity-passive-product/CRGCQ0805F15K/A129763CT-ND/8577595
R6: "RES 1K OHM 1% 1/4W 0805", Manufacturer="Stackpole Electronics Inc", Manufacturer Part Number=RNCP0805FTD1K00, Supplier 1 Part Number=RNCP0805FTD1K00CT-ND, Local Supplier=thegioiic, Local Supplier Link=https://www.thegioiic.com/products/dien-tro-1-kohm-0805-5, Supplier 1=Digikey, Supplier 1 Link=https://www.digikey.com/product-detail/en/stackpole-electronics-inc/RNCP0805FTD1K00/RNCP0805FTD1K00CT-ND/2240568
R7 R10 R11 R12 R13 R19 R20 R21 R22: "RES 10K OHM 1% 1/4W 0805", Manufacturer="Stackpole Electronics Inc", Manufacturer Part Number=RNCP0805FTD10K0, Supplier 1 Part Number=RNCP0805FTD10K0CT-ND, Local Supplier=thegioiic, Local Supplier Link=https://www.thegioiic.com/products/dien-tro-10-kohm-0805-5, Supplier 1=Digikey, Supplier 1 Link=https://www.digikey.com/product-detail/en/stackpole-electronics-inc/RNCP0805FTD10K0/RNCP0805FTD10K0CT-ND/2240601
R14 R15 R16 R17 R18: "RES SMD 47K OHM 1% 1/8W 0805", Manufacturer=Yageo, Manufacturer Part Number=RC0805FR-0747KL, Supplier 1 Part Number=311-47.0KCRCT-ND, Local Supplier=thegioiic, Local Supplier Link=https://thegioiic.com/products/dien-tro-47k-ohm-0603-5, Supplier 1=Digikey, Supplier 1 Link=https://www.digikey.com/product-detail/en/yageo/RC0805FR-0747KL/311-47.0KCRCT-ND/730920
S1 S2 S3 S4 S5 S6: "WS-TASV J-Bend SMT Tact Switch 6x3.5mm, height 4.3mm, 260gf", Local Supplier Part Number=x, Operating Temperature="-40 to +85degC", Rated Current=50mA, Rated Voltage=12VDC, ComponentLink1Description=Manufacturer, ComponentLink1URL=http://www.we-online.de, ComponentLink2Description=Datasheet, ComponentLink2URL=https://katalog.we-online.com/em/datasheet/434113043826.pdf, Contact Material="Stainless Steel", Contact Plating=Silver, Height=4.3mm, Local Supplier=thegioiic, Local Supplier Link=https://www.thegioiic.com/products/nut-nhan-3-5x6mm-cao-5mm-2-chan-smd-dau-trang, Mounting Technology=SMT, Operation Force=260gf, Packaging="Tape and Reel", Part Number=434113043826, Published Date="September 2019", Publisher="Wurth Elektronik", Terminal Material="Copper Alloy", Terminal Plating=Silver, Washable=No
U1 U2 U3: "Available in 1.8V, 2.5V, 2.85V, 3.3V, 5V, and  Adjustable Versions", Local Supplier=thegioiic, Local Supplier Link=https://www.thegioiic.com/products/ams1117-3-3v
U4 U5: Manufacturer="ST Electronic", Local Supplier=thegioiic, Local Supplier Link=https://www.thegioiic.com/products/stm32f103c8t6, Local Supplier Part Number=STM32F103C8T6, Manufacture Part Number=STM32F103C8T6
U7 U8: "No Description Available", Mfr_Name=NXP, Copyright="Copyright (C) 2022 Ultra Librarian. All rights reserved.", Manufacturer_Part_Number=74HC245N, RefDes=RefDes, Type=DEV
U*1: "8 pin, PUSH-PUSH"
Y1 Y2: library part XTAL, "No Description Available", Manufacturer_Part_Number=CX5032GB08000H0HEQZ1, Mfr_Name="KYOCERA AVX", Copyright="Copyright (C) 2023 Ultra Librarian. All rights reserved.", RefDes=RefDes, Type=DEV
PI1: Local Supplier=thegioiic, Local Supplier Link=https://www.thegioiic.com/products/l7805acd2t

## Free pads (board coordinates)
  round 137.8 hole 137.8: 12(1496.06,4606.3) 13(4825,4606.3) 14(4825,1653.7) 15(1496.06,1653.7)

## Via types
v1: diameter 20, hole 10, Top Layer to Bottom Layer, tented both sides, 85 vias
v2: diameter 20, hole 10, Top Layer to Bottom Layer, 17 vias
v3: diameter 118.11, hole 118.11, Top Layer to Bottom Layer, 4 vias
v4: diameter 40, hole 20, Top Layer to Bottom Layer, tented both sides, 3 vias

## Nets (pads, with @x,y where several pads share a name; then routed paths per layer and width w, separated by ;. In a path a pad name is that pad's centre, name@x,y a point inside that pad or via, vN(x,y) a via of type N, cw(c..) or ccw(c..) an arc to the next point about the centre after c; other vN are vias at no path point)
5V: B1.1 C3.2 C29.1 C32.1 CR1.6 CR1.9 CR1.11 CR2.6 CR2.9 CR2.11 PI1.3 U1.3 U2.3 U3.3 | length 7576.1
  Top Layer w30: U2.3 U2.3@1788.31,2399.66 ; PI1.3 1793,2072 ; C3.2 1799,2066 1793,2072 ; U1.3 U3.3 2070,2399.66 ; v4(3982,2888) 3982,2732.57 3962.43,2713 2788,2713 2715.91,2785.09 B1.1 2087.57,2785.09 2070,2767.52 2070,2399.66 ; v4(3982,3804) 3983,3805 C29.1 ; C32.1 4127,4236.33 4127,4311 4264.35,4448.35 4264.35,4465.35 CR2.9 ; C29.1@4159.67,3805 4161.17,3806.5 4353.5,3806.5 CR1.11 CR1.9 4411,3908 4434,3931 4434,4075.57 ; CR1.6 4536.35,4058 4451.57,4058 4434,4075.57 ; v4(4632,4317) 4451.57,4317 4434,4299.43 4434,4075.57 ; U2.3@1788.31,2399.66 2070,2399.66 ; U2.3@1788.31,2399.66 1793,2394.97 1793,2072
  Bottom Layer w30: v4(3982,2888) v4(3982,3804) ; CR2.11 CR2.9 4270.43,4474.57 4270.43,4524.57 CR2.6 4129.65,4680.65 4129.65,4711.43 4147.23,4729 4601.43,4729 4632,4698.43 v4(4632,4317)
5V_USB: 1.1 J1.1 | length 393.3
  Top Layer w10: J1.1 1191.86,2524.18 1186,2518.32 1186,2344.86 1203.86,2327 1271,2327 1288,2344 1.1
12V: C1.1 C2.2 P1.1 P2.1 PI1.1 | length 1891.1
  Top Layer w50: P1.1 1405.71,2060.77 1521.74,2060.77 ; C2.2 1640,1932 1640,2058.54 C1.1 1637.77,2060.77 1521.74,2060.77 ; PI1.1 1993,1779 1959,1745 1572,1745 1521.74,1795.26 1521.74,2060.77
  Bottom Layer w50: P1.1 1416.02,2050.46 1416.02,1972.98 1603,1786 1603,1516 P2.1
BOOT0: R8.1 U5.44 | length 310
  Top Layer w10: R8.1 1938.49,4198 2012.01,4124.47 U5.44
BOOT1: R9.2 U5.20 | length 1012.6
  Top Layer w10: R9.2 1510.5,4198 1547.5,4235 1774.79,4235 1792.79,4253 1943,4253 1969,4279 2148,4279 2243.47,4183.53 U5.20
BUZZER: R5.1 U4.19 | length 1075.1
  Top Layer w10: v2(1531,3224) 1531,3049.02 1536.86,3043.16 U4.19 ; v1(1993,3344) 2261,3344 R5.1
  Bottom Layer w10: v2(1531,3224) 1530,3225 1530,3272 1602,3344 v1(1993,3344)
CMD: R17.1 U4.17 U*1.3 | length 2074.3
  Top Layer w10: U4.17 1725.47,3082.53 1732.54,3075.46 1732.54,3075.16 1746,3061.71 v1(1746,3059) ; v2(2393,1999.82) 2424.82,1999.82 R17.1 ; R17.1@2442,2016 2442,1476.82 U*1.3
  Bottom Layer w10: v1(1746,3059) 1746,2649 2393,2002 v2(2393,1999.82)
CS: R18.1 U4.14 U*1.2 | length 2413.7
  Top Layer w10: v2(1559.42,3141.58) U4.14 ; v2(2463.36,1943.36) 2534,2014 2569,2014 R18.1 2571,1687 2493,1609 2493,1477 U*1.2
  Bottom Layer w10: v2(1559.42,3141.58) 1559.42,2727.58 2322,1965 2442.57,1965 2463.36,1944.22 v2(2463.36,1943.36)
D+: 1.2 R4.2 U4.33 | length 734.3
  Top Layer w10: 1.2 R4.2 1471.5,2443 1833.21,2804.71 U4.33
D-: R1.2 U4.32 | length 548
  Top Layer w10: R1.2 1486.48,2531 1813.03,2857.54 1813.03,2886.5 U4.32
DAT0: R16.1 U4.16 U*1.7 | length 2025.5
  Top Layer w10: U4.16 1700.89,3102.21 v2(1701.21,3102.53) ; v2(2264,2060) 2264.68,2059.32 2316.14,2059.32 2322,2053.46 R16.1 ; U*1.7 2278.46,1736.54 2323,1781.07 R16.1@2323,2016
  Bottom Layer w10: v2(1701.21,3102.53) 1700,3101.32 1700,2624 v2(2264,2060)
DAT1: R15.1 U*1.8 | length 569.8
  Top Layer w10: R15.1@2189,2017 2188,2016 2188,1788 2235.16,1740.84 U*1.8
DAT2: R14.1 U*1.1 | length 593.9
  Top Layer w10: U*1.1 2538.31,1614.31 2647,1723 R14.1
DRILL_PWM_1: CR2.13 D12.2 D16.1 P14.2 | length 6085.9
  Top Layer w50: P14.2 1110.46,4798.46 1254,4942 4533,4942 4684,4791 4684,4407.29 4649.71,4373 4307.57,4373 4266.64,4332.07 4266.64,4211.5 4087.14,4032 3524.86,4032 3399.86,4157 3325,4157 ; D12.2@3325,4055.61 3325,4157 ; D16.1@3325,4234.39 3325,4157 ; 4472,4408.29 CR2.13
DRILL_PWM_2: CR2.14 D13.2 D17.1 P14.1 | length 5783.3
  Top Layer w50: P14.1 1276.8,4688.48 1276.8,4760.7 1396.1,4880 4492.71,4880 4522,4850.71 CR2.14 4516.59,4673 4442.05,4598.46 3065.29,4598.46 3036,4569.17 3036,4185.29 3006.71,4156 2936.25,4156 ; D13.2@2936.25,4055.61 2936.25,4156 ; D17.1@2936.25,4234.39 2936.25,4156
GND: C1.2 C2.1 C3.1 C4.2 C5.2 C6.1 C7.1 C8.2 C9.2 C10.2 C11.1 C12.1 C13.1 C14.1 C15.1 C16.1 C17.1 C18.1 C19.2 C20.2 C21.2 C22.1 C23.1 C24.2 C25.1 C26.1 C27.1 C28.1 C29.2 C30.2 C31.1 C32.2 C33.2 C34.1 CR1.8 CR2.8 D6.2 D7.2 D8.2 D9.2 D14.2 D15.2 D16.2 D17.2 J1.4 J1.5 P1.2 P3.1 P4.3 P5.1 P6.1 P7.3 P8.1 P9.2 P10.2 P11.2 P12.2 P13.2 P15.2 PI1.4 Q1.2 R23.1 R24.1 R25.1 R26.1 S1.1 S2.1 S3.1 S4.1 S5.1 S6.1 U1.1 U2.1 U3.1 U4.8 U4.23 U4.35 U4.47 U5.8 U5.23 U5.35 U5.47 U6.1 U7.10 U7.19 U8.1 U8.10 U8.19 U*1.6 U*1.9 U*1.10 U*1.11 | length 129
  Top Layer w10: v2(3693,1436) 3756.3,1436 S4.1 ; v2(3693,1640) S3.1
L298_12V: C30.1 C33.1 CR1.4 CR2.4 D2.1 D3.1 D4.1 D5.1 D10.1 D11.1 D12.1 D13.1 P2.2 | length 13163.8
  Top Layer w50: D2.1 D5.1 D4.1 D3.1 2749.67,3875.09 D10.1 ; C30.1 3587.28,3892.39 D12.1 D11.1 D13.1 D10.1 ; CR2.4 4018.17,4676.83 4018.17,4787.71 3988.88,4817 2651.29,4817 2622,4787.71 2622,3939.18 2651.29,3909.89 2714.88,3909.89 D10.1 ; C33.1 4126,3330.67 4126,3382 4214,3470 4513,3470 4661,3618 4661,4128.71 4631.71,4158 CR1.4 ; C33.1@4177.85,3330 C33.1@4188.28,3340.43
  Bottom Layer w50: P2.2 1605,1412 1711,1306 4573.71,1306 4606,1338.29 4606,2309 4660,2363 4825.71,2363 4855,2392.29 4855,4124.88 4825.71,4154.17 4662.71,4154.17 ; CR2.4 4022,4765.71 4051.29,4795 4662.71,4795 4692,4765.71 4692,4183.46 4662.71,4154.17 ; CR1.4 4558.83,4154.17 4662.71,4154.17
LED_NOTIFY: R6.1 U4.18 | length 2473.6
  Top Layer w10: U4.18 1712.16,3062.84 1748,3027 v1(1800,3027) ; v1(2787,1692) 2788,1693 3263.14,1693 3269,1687.14 R6.1
  Bottom Layer w10: v1(1800,3027) 1800,2674 2290.04,2183.96 2295.04,2183.96 v1(2787,1692)
MBOOT0: R2.1 U4.44 | length 1260.5
  Top Layer w10: R2.1 1836,3801 1813.5,3778.5 1658.71,3778.5 1541,3660.79 1541,3294 1752.47,3082.53 U4.44
MBOOT1: R3.2 U4.20 | length 928.1
  Top Layer w10: R3.2 1508,3029.33 1513.86,3023.47 U4.20
MCU_3V3: C5.1 C14.2 C19.1 C20.1 C21.1 C31.2 C34.2 P6.4 P7.1 P8.3 P12.5 P13.5 P15.5 R10.2 R11.2 R12.2 R13.2 U3.2 U3.4 U5.9 U5.24 U5.36 U5.48 U7.1 U7.20 U8.20 | length 18061.6
  Top Layer w10: P6.4 1100,1350 1160,1290 2136.14,1290 2142,1295.86 2142,2302 2167,2327 2615,2327 2655,2367 2655,2413 2620,2448 2421.38,2448 U3.4 ; P13.5 1408,2923 1417,2932 1417,3893.14 1411.14,3899 P12.5 ; P8.3 1733,4387 P7.1 1947.62,4388 2012.62,4323 2172.73,4323 U5.36@2173.23,4322.5 ; v1(2022,3435) v1(2022,3745) ; v1(2022.5,4045) 2023.23,4045.73 U5.48 ; v1(2114,3095) 2260,3095 2262,3097 v1(2267,3097) ; U3.2 U3.4 ; C19.1 2173.23,4406.73 U5.36@2173.23,4322.5 ; v1(2262,2746) 2263,2745 v1(2378,2745) 2378,2491.38 U3.4 ; U5.9 2330.71,3886.29 C21.1 2332,3885 v1(2332,3809) ; C5.1 2447.5,4398.5 U5.24 2194.73,4262.27 2173.73,4283.27 2173.73,4319.5 U5.36 U5.36@2173.23,4322.5 ; v1(2821,1427) 2821,1313.86 2826.86,1308 4297.14,1308 4303,1313.86 C31.2 U8.20 v1(4546,1377) ; v1(4780,2516) 4782,2518 4782,2629.14 4776.14,2635 4613,2635 4546,2702 v1(4546,3386) U7.20 4790,3386 C34.2
  Bottom Layer w10: P6.4 1100,1323 C14.2 ; P12.5 1409,3899 1422,3912 1422,4381.14 1427.86,4387 P8.3 ; 1417.25,4273 1262.86,4273 1257,4278.86 1257,4526 1475,4744 1882.14,4744 1888,4738.14 P15.5 1888,4570 1917,4541 v1(2071,4541) v1(2341,4541) 2516,4541 v1(2518,4539) ; v1(2022,3435) 2022,3374 2112,3284 2112,3097 v1(2114,3095) ; v1(2022,3745) 2022,3746 2022.5,3746.5 v1(2022.5,4045) ; v1(2267,3097) 2267,3094.29 2262,3089.29 2262,2722.11 3030,1954.11 3030,1674 R13.2 3032,1432.86 3026.14,1427 v1(2821,1427) ; v1(2332,3809) 2331,3808 2331,2787 2368,2750 2370.29,2750 2375.29,2745 v1(2378,2745) ; U7.1 v1(4546,3386) ; v1(4546,1377) 4546,2317 4640,2411 4740,2411 4780,2451 v1(4780,2516)
MCU_HOME_X: C16.2 P9.1 R10.1 U5.33 | length 2062.9
  Top Layer w10: U5.33 2232.29,4448.71 2219,4462 2168.86,4462 2163,4467.86 2163,4539 R10.1 2161,4543.5 2263,4645.5 2263,4693 2262,4694 2262,4772 v1(2263,4773)
  Bottom Layer w10: v1(2263,4773) 2263,4774 2306.5,4817.5 3604.14,4817.5 3610,4811.64 C16.2 ; P9.1 C16.2@3610.2,4765
MCU_HOME_Y: C17.2 P10.1 R11.1 U5.32 | length 1526.6
  Top Layer w10: U5.32 2251.97,4540.03 R11.1 2251,4543.5 2271,4563.5 2273.5,4563.5 2310,4600 2397.14,4600 2403,4605.86 v1(2403,4749)
  Bottom Layer w10: v1(2403,4749) 2456.5,4802.5 3230.14,4802.5 3236,4796.64 P10.1@3236,4672.52
MCU_HOME_Z: C18.2 P11.1 R12.1 U5.31 | length 1088.7
  Top Layer w10: U5.31 2271.66,4481.34 2282.32,4492 2428.14,4492 2434,4497.86 2434,4535 R12.1 2429,4542 2429,4718.29 2426,4721.29 v1(2426,4724)
  Bottom Layer w10: v1(2426,4724) 2861.05,4724 ; C18.2 2861.05,4764.95 2861.05,4724 ; P11.1 2861.05,4724
MMCU_3V3: C4.1 C6.2 C8.1 C9.1 C10.1 D1.2 P3.4 P4.1 P5.3 R7.2 R19.2 R20.2 R21.2 R22.2 U2.2 U2.4 U4.9 U4.24 U4.36 U4.48 | length 8902.6
  Top Layer w10: v1(1327,1636) 1327,2107 1704.44,2484.44 1755.06,2484.44 U2.2 1892,2490.21 ; U4.24 1467.27,2944.73 1453,2959 v1(1453,3683) 1453,4029.14 1458.86,4035 P5.3 1733,4035 P4.1 ; U4.9 C10.1@1734.79,3320 ; v1(1746,3683) 1862,3683 1885,3660 1885,3322 v1(1886,3321) ; U4.36 1892.27,2800.27 1891,2799 v1(1891,2737) 1892,2736 1892,2490.21 ; U4.48 2040.73,3161.27 v1(2041,3161) ; U2.4 1892,2490.21 ; v1(2865,1672) 2865,1361 2887,1339 3268.14,1339 3274,1344.86 3274,1393.66 D1.2 3351.14,1398.66 3358,1405.52 v1(3358,1435)
  Bottom Layer w10: P3.4 1100,1610 1126,1636 v1(1327,1636) ; v1(1453,3683) 1734,3683 1735.86,3684.86 1744.14,3684.86 v1(1746,3683) ; v1(1739,3320) 1739.5,3320.5 1885.5,3320.5 v1(1886,3321) 2036,3321 2042,3315 2042,3164 2041,3163 v1(2041,3161) 1994,3114 1994,2866 1891.83,2763.83 1891.83,2739.69 1891,2738.86 1891,2694 2865,1720 v1(2865,1672) ; v1(3358,1435) R19.2 3358,1690.14 3363.86,1696 3838,1696 R21.2 3845,1691 3845,1748.14 3850.86,1754 4035,1754 4052,1737 R22.2
MNRST: C12.2 R7.1 S1.2 U4.7 | length 2338
  Top Layer w10: v2(1772.96,3142.96) 1774.16,3144.16 U4.7 ; S1.2 2955,1623.97 2955,1576 v2(2956,1575)
  Bottom Layer w10: v2(1772.96,3142.96) 1772.96,2662.04 2859.36,1575.64 2955.36,1575.64 v2(2956,1575) 2956,1671 R7.1
MOSC_IN: C7.2 U4.5 Y1.1 | length 526.2
  Top Layer w10: C7.2 1793.5,3589 1849,3533.5 1849,3393.56 1813.53,3358.08 U4.5
MOSC_OUT: C11.2 U4.6 Y1.2 | length 361.1
  Top Layer w10: C11.2 1792.5,3461 Y1.2 1793.84,3460.66 U4.6
MSWDCLK: P3.2 U4.37 | length 1690.2
  Top Layer w10: P3.2 1297,1528 1297,2112 1540,2355 1540,2462.22 1826.78,2749 v1(1827,2749) ; v1(1950,2910) U4.37
  Bottom Layer w10: v1(1827,2749) 1950,2872 v1(1950,2910)
MSWDIO: P3.3 U4.34 | length 1631
  Top Layer w10: P3.3 1201,2044 1521,2364 1521,2471.28 1852.9,2803.18 U4.34
NetB1_2: B1.2 Q1.3 | length 264.1
  Top Layer w20: B1.2 2528.18,3041.18 2528.18,3304.82 Q1.3
NetC25_2: C25.2 R19.1 S3.2 U4.39 | length 2508.4
  Top Layer w10: U4.39 2020.9,2984.1 v1(2061,2944) ; v1(2823.5,1954) 3088,1954 3402,1640 S3.2 3546.7,1638 3592,1638 3592.09,1638.09 3601.09,1638.09 v2(3603,1640)
  Bottom Layer w10: v1(2061,2944) 2061,2703 2809.07,1954.93 2822.57,1954.93 v1(2823.5,1954) ; R19.1 3450,1640 v2(3603,1640)
NetC26_2: C26.2 R20.1 S4.2 U4.38 | length 2644.3
  Top Layer w10: U4.38 2009.99,2964.42 2030,2944.41 v1(2030,2942) ; v1(2803,1923) 3072,1923 3335,1660 3335,1576 3476,1435 S4.2 3545.7,1434 3594,1434 3594.09,1434.09 3601.09,1434.09 v2(3603,1436)
  Bottom Layer w10: v1(2030,2942) 2030,2685 2790.09,1924.91 2801.09,1924.91 v1(2803,1923) ; R20.1 3449,1436 v2(3603,1436)
NetC27_2: C27.2 R21.1 S5.2 U4.40 | length 2914.3
  Top Layer w10: U4.40 2046.21,3003.79 2066.88,2983.12 2087.55,2962.45 2087.55,2955.38 v1(2089.46,2953.46) ; v1(2842,1983) 3105,1983 3388,1700 3924,1700 3936,1688 S5.2 ; v2(3935,1567) S5.2@3935,1626.3
  Bottom Layer w10: v1(2089.46,2953.46) 2089.46,2723.54 2828.32,1984.68 2840.32,1984.68 v1(2842,1983) ; R21.1 3935,1689 v2(3935,1567)
NetC28_2: C28.2 R22.1 S6.2 U4.41 | length 3123.3
  Top Layer w10: U4.41 2067.53,3023.47 2119,2972 v1(2119,2970) ; v1(2849,2012) 3129,2012 3414,1727 4102,1727 4141,1688 S6.2 v2(4141,1567)
  Bottom Layer w10: v1(2119,2970) 2119,2742 v1(2849,2012) ; v2(4141,1567) 4142,1568 R22.1
NetCR1_1: CR1.1 R23.2 | length 136
  Bottom Layer w50: R23.2 4220,4308 CR1.1
NetCR1_5: CR1.5 U7.18 | length 1209.1
  Bottom Layer w10: CR1.5 4404,4108 4510,4002 4535.36,4002 4536.36,4003 4573.64,4003 4761,3815.64 4761,3191.86 4755.14,3186 U7.18
NetCR1_7: CR1.7 U7.17 | length 1173.2
  Bottom Layer w10: CR1.7 4416,4008 4513,3911 4594.57,3911 4661,3844.57 4661,3093 4668,3086 U7.17
NetCR1_10: CR1.10 U7.16 | length 998.5
  Bottom Layer w10: CR1.10 4605,3858 4641,3822 4641,2991.86 4646.86,2986 U7.16
NetCR1_12: CR1.12 U7.15 | length 1006.5
  Bottom Layer w10: CR1.12 4609,3758 4623,3744 4623,2900.21 4637.21,2886 U7.15
NetCR1_15: CR1.15 R24.2 | length 139
  Top Layer w50: R24.2 4217,3608 CR1.15
NetCR2_1: CR2.1 R25.2 | length 214
  Top Layer w50: R25.2 3660,4473 CR2.1
NetCR2_5: CR2.5 U7.14 | length 2456.5
  Top Layer w10: v1(3957,4162) 3957,4316 4069.86,4428.86 4069.86,4470.86 CR2.5
  Bottom Layer w10: v1(3957,4162) 4386,4162 4435.17,4112.83 4563.81,4112.83 4781,3895.64 4781,2822 4745,2786 U7.14
NetCR2_7: CR2.7 U7.13 | length 2433
  Top Layer w10: v1(4012,4111) 4012,4259 4172,4419 CR2.7
  Bottom Layer w10: v1(4012,4111) 4283,4111 4296,4098 4296,3963.86 4301.86,3958 4435.14,3958 4441,3952.14 4441,3780 4516,3705 4571.64,3705 4600,3676.64 4600,2753 4665.5,2687.5 4704.5,2687.5 U7.13
NetCR2_10: CR2.10 U7.12 | length 3401.7
  Top Layer w10: v1(3931,4329) 3929.09,4330.91 3929.09,4353.09 4023,4447 4023,4517 4054,4548 v1(4322,4548) ; v1(4507,4208) 4699,4208 4747,4160 4747,3616 4503,3372 4503,2668 4581.5,2589.5 4702.5,2589.5 U7.12
  Bottom Layer w10: v1(3931,4329) 3931,4293 3969,4255 4411,4255 4458,4208 v1(4507,4208) ; v1(4322,4548) CR2.10
NetCR2_12: CR2.12 U7.11 | length 4044.4
  Top Layer w10: v1(3479,4141) 3546,4074 3976.14,4074 3982,4079.86 3982,4291 4125,4434 4125,4501 4149,4525 4423,4525 v1(4424,4524)
  Bottom Layer w10: v1(3479,4141) 3653,4141 3889,3905 4097.14,3905 4103,3899.14 4103,3681 4307,3477 4565.14,3477 4571,3471.14 4571,2564 4649,2486 U7.11 ; CR2.12 4423,4672 4423,4525 v1(4424,4524)
NetCR2_15: CR2.15 R26.2 | length 94.8
  Bottom Layer w50: R26.2 4570,4564.5 4572,4562.5 CR2.15
NetD1_1: D1.1 R6.2 | length 70.7
  Top Layer w10: D1.1 R6.2
NetJ1_2: J1.2 R1.1 | length 118.4
  Top Layer w10: J1.2 1274.59,2498.59 1304,2528 1337,2528 R1.1
NetJ1_3: J1.3 R4.1 | length 121.6
  Top Layer w10: J1.3 1276,2473 1305.86,2443.14 1329.86,2443.14 R4.1@1340,2433
NetP4_2: P4.2 R2.2 | length 102
  Top Layer w10: P4.2 R2.2
NetP5_2: P5.2 R3.1 | length 96.8
  Top Layer w10: R3.1 1510,3937 P5.2
NetP7_2: P7.2 R8.2 | length 102.4
  Top Layer w10: P7.2 1835,4287 R8.2
NetP8_2: P8.2 R9.1 | length 96.4
  Top Layer w10: R9.1 1509,4289 P8.2
NetQ1_1: Q1.1 R5.2 | length 106
  Top Layer w10: R5.2 2352.5,3342.5 Q1.1
NetU4_12: U4.12 U5.13 | length 1816.8
  Top Layer w10: U4.12 1676.23,3218.5 1676.23,3182.77 1736.04,3122.96 1871.96,3122.96 1910,3161 1910,3314 1997,3401 2522,3401 2549,3428 2549,3629 2460,3718 2460,4045.23 2459.5,4045.73 U5.13
NetU4_13: U4.13 U5.12 | length 1687.3
  Top Layer w10: U4.13 1618,3195.79 1526,3287.79 1526,3667 1684,3825 1684,3987.64 1689.86,3993.5 2037.64,3993.5 2071.14,4027 2383.41,4027 2389.27,4021.14 2389.27,3988.5 U5.12
NetU4_15: U4.15 U*1.5 | length 2021.1
  Top Layer w10: U4.15 1618.16,3122.06 1665.84,3122.06 v1(1666,3122.21) ; v2(2364.5,2000.03) 2364.5,1913.5 2365.08,1912.92 U*1.5
  Bottom Layer w10: v1(1666,3122.21) 1691,3122.21 1691.32,3122.53 1713.61,3122.53 1724,3112.14 1724,2640.53 v2(2364.5,2000.03)
NetU4_42: U4.42 U6.3 | length 1761.2
  Top Layer w10: U4.42 2075.13,3043.16 2168.28,2950 2743,2950 2868,3075 3568.57,3075 3574.52,3069.05 3574.52,3041.48 U6.3
NetU4_43: U4.43 U6.4 | length 1881.1
  Top Layer w10: U4.43 2098.16,3062.84 2188,2973 2738,2973 2857,3092 3680.14,3092 3686,3086.14 U6.4
NetU5_10: U5.10 U8.4 | length 3954
  Top Layer w10: U5.10 2350.4,3943.31 2366,3927.71 v1(2366,3925) ; v1(3105,2230) 3320,2015 4317.8,2015 4420.3,1912.5 4420.7,1912.5 4656.2,1677 U8.4
  Bottom Layer w10: v1(2366,3925) 2457.14,3925 2463,3919.14 2463,3286 2642,3107 2642,2693 v1(3105,2230)
NetU5_11: U5.11 U8.5 | length 3865
  Top Layer w10: U5.11 2370.58,3987.5 2370.58,3958.54 2380.13,3949 2415,3949 v1(2416,3948) ; v1(3146,2261) 3334,2073 4359.8,2073 4420.3,2012.5 4420.7,2012.5 4656.2,1777 U8.5
  Bottom Layer w10: v1(2416,3948) 2477,3948 2500,3925 2500,3319 2686,3133 2686,2721 v1(3146,2261)
NetU5_14: U5.14 U7.8 | length 4093.2
  Top Layer w10: v1(2185,3438) v1(2185,3892) ; v1(2242,2925) 2825,2925 2851.72,2898.28 v1(2988.28,2898.28) ; v1(2270,4065) 2270.42,4065.42 U5.14
  Bottom Layer w10: v1(2185,3438) 2185,3416 2242,3359 v1(2242,2925) ; v1(2185,3892) 2270,3977 v1(2270,4065) ; v1(2988.28,2898.28) 2989,2899 3318,2899 3801,2416 4440.14,2416 4446,2421.86 4446,2677.01 4440.14,2682.87 4409.13,2682.87 U7.8
NetU5_15: U5.15 U7.6 | length 4465
  Top Layer w10: v1(2148,3440) 2150,3440 v1(2150,3894) ; v1(2205,2901) 2206,2900 2806,2900 2837.8,2868.2 v1(2990.09,2868.2) ; v1(2239,4087) 2240.9,4085.1 U5.15
  Bottom Layer w10: v1(2148,3440) 2148,3401 2204,3345 2204,2902 v1(2205,2901) ; v1@2151.91,3902.91 2239,3990 v1(2239,4087) ; v1(2990.09,2868.2) 3299.8,2868.2 3774,2394 4466.14,2394 4472,2399.86 4472,2861 4447,2886 U7.6
NetU5_16: U5.16 U7.9 | length 3034.8
  Top Layer w10: U5.16 2487.21,4104.79 2511,4081 2511,3727 2626,3612 v1(2626,3613)
  Bottom Layer w10: v1(2626,3613) 3225,3613 3747,3091 3747,2684 3845,2586 U7.9
NetU5_17: U5.17 U7.7 | length 3150.7
  Top Layer w10: U5.17 2492.53,4124.47 2536,4081 2536,3741.25 2625.25,3652 v1(2627,3652)
  Bottom Layer w10: v1(2627,3652) 3270,3652 3796,3126 3796,2709 3861.86,2643.14 4353.14,2643.14 4359,2649 4359,2779 4366,2786 U7.7
NetU5_18: U5.18 U7.5 | length 3279.5
  Top Layer w10: U5.18 2505.84,4144.16 2555,4095 2555,3770 v1(2628,3697)
  Bottom Layer w10: v1(2628,3697) 3307,3697 3836,3168 3836,2755 3899,2692 4330.14,2692 4336,2697.86 4336,2980.14 4341.86,2986 U7.5
NetU5_19: U5.19 U7.3 | length 3391.3
  Top Layer w10: U5.19 2514.16,4163.84 2579,4099 2579,3787 v1(2629,3737)
  Bottom Layer w10: v1(2629,3737) 3334,3737 3885,3186 3885,2796 3940,2741 4293.14,2741 4299,2746.86 4299,3170 4315,3186 U7.3
NetU5_29: U5.29 U8.6 | length 4464.9
  Top Layer w10: U5.29 2311.03,4439.14 2316.89,4445 2539,4445 2554,4430 v1(2554,4153) ; v1(3182,2293) 3184.71,2293 3187.71,2290 3188,2290 3342,2136 4396.8,2136 4420.3,2112.5 4420.7,2112.5 4531.85,2001.35 4531.85,2000.15 4655,1877 U8.6
  Bottom Layer w10: v1(2554,4153) 2554,3326 2732,3148 2732,2743 v1(3182,2293)
NetU5_30: U5.30 U8.7 | length 4457.5
  Top Layer w10: U5.30 2291.34,4460.14 2297.2,4466 2557,4466 2579,4444 v1(2579,4153) ; v1(3216,2324) 3315,2225 4414,2225 4662,1977 U8.7
  Bottom Layer w10: v1(2579,4153) 2579,3361 2763,3177 2763,2776 3215,2324 v1(3216,2324)
NetU5_42: U5.42 U8.3 | length 4419.1
  Top Layer w10: U5.42 2293.42,4163.84 2314,4143.26 v1(2314,4142) ; v1(3073,2195) 3073,2192.29 3084,2181.29 3084,2181 3311,1954 4278,1954 4390.5,1841.5 4391.7,1841.5 4656.2,1577 U8.3
  Bottom Layer w10: v1(2314,4142) 2314,3901.86 2319.86,3896 2420,3896 2428,3888 2428,3253 2613,3068 2613,2655 v1(3073,2195)
NetU5_43: U5.43 U8.2 | length 4464.9
  Top Layer w10: U5.43 2288.14,4144.16 2294,4138.3 v1(2294,4113) ; v1(3037,2161) 3295,1903 4230,1903 4370.5,1762.5 4370.5,1762.3 4420.3,1712.5 4420.7,1712.5 4656.2,1477 U8.2
  Bottom Layer w10: v1(2294,4113) 2295,4112 2295,3888.86 2308.86,3875 2388.14,3875 2394,3869.14 2394,2804 v1(3037,2161)
NetU5_45: U5.45 U7.4 | length 4732.9
  Top Layer w10: v1(2106,3440) v1(2106,3896) ; U5.45 2116,4104.29 2143.43,4104.29 2143.68,4104.03 v1(2206,4104) ; v1(2172,2867) 2796,2867 2822,2841 v1(2946,2841)
  Bottom Layer w10: v1(2106,3440) 2106,3392 2172,3326 v1(2172,2867) ; v1(2106,3896) 2106,3902 2206,4002 v1(2206,4104) ; v1(2946,2841) 3262,2841 3736,2367 4503.14,2367 4509,2372.86 4509,3041 4464,3086 U7.4
NetU5_46: U5.46 U7.2 | length 5031.6
  Top Layer w10: v1(2065,3891) 2065,3438 v1(2067,3436) ; U5.46 2178.19,4085.1 2181.29,4082 v1(2184,4082) ; v1(2149,2838) 2772.21,2838 2805.21,2805 v1(2866,2805)
  Bottom Layer w10: v1(2065,3891) 2067,3891 2184,4008 v1(2184,4082) ; v1(2067,3436) 2067,3381 2149,3299 v1(2149,2838) ; v1(2866,2805) 3237,2805 3702,2340 4533.79,2340 4547,2353.21 4547,3199 4460,3286 U7.2
NRST: C22.2 R13.1 S2.2 U5.7 | length 2807.1
  Top Layer w10: v2(2291,3808) 2291.17,3808.17 2291.17,3987.83 U5.7 ; S2.2 3121,1597 3122,1596 v2(3122,1575)
  Bottom Layer w10: v2(2291,3808) 2291,2747 3122,1916 3122,1734 R13.1 v2(3122,1575)
OSC_IN: C13.2 U5.5 Y2.1 | length 687.4
  Top Layer w10: U5.5 2251.97,3769.93 2216.2,3734.17 2216.2,3515.24 2269.45,3462 C13.2
OSC_OUT: C15.2 U5.6 Y2.2 | length 523.8
  Top Layer w10: U5.6 2271.66,3882.19 2271,3881.53 2271,3753.72 2271.66,3753.06 2271.66,3587.79 Y2.2 2392.76,3587.24 C15.2
SWDCLK: P6.2 U5.37 | length 3848.3
  Top Layer w10: P6.2 1299,1418 1247,1470 1177.62,1470 1150,1497.62 1150,1929.18 1070,2009.18 1070,2622.79 1275.66,2828.45 1275.66,4107.66 1287,4119 1740,4119 1781.5,4160.5 1781.5,4210.14 1809.36,4238 1951.12,4238 1975.38,4262.27 U5.37
SWDIO: P6.3 U5.34 | length 4269.3
  Top Layer w10: P6.3 1145,1469 1052.86,1469 1047,1474.86 1047,2621 1260.66,2834.66 1260.66,4367.66 1340,4447 2206.74,4447 2212.6,4441.14 U5.34
VDD: C23.2 C24.1 R14.2 R15.2 R16.2 R17.2 R18.2 U1.2 U1.4 U6.2 U*1.4 | length 4666.5
  Top Layer w10: R15.2 R16.2 R17.2 R18.2 R14.2 2718,2106 ; U*1.4 2408.39,1445.47 2456.86,1397 2713.14,1397 2719,1402.86 2719,2105 2718,2106 ; U1.2 U1.4 U1.4@2774,2484.56 ; U6.2 C23.2 4065,2934 4076,2923 4076,2504 4062,2490 2779.44,2490 U1.4@2774,2484.56 ; 2718,2106 2768.14,2106 2774,2111.86 U1.4@2774,2484.56
X_ENC_A: P13.3 U8.18 | length 4964.4
  Bottom Layer w10: P13.3 1245,3223 1056,3034 1056,2324.86 1138.86,2242 1417,2242 2283,1376 4302,1376 4327,1401 4327,1537 4367,1577 U8.18
X_ENC_B: P13.4 U8.17 | length 4869.6
  Bottom Layer w10: P13.4 1223,3073 1078,2928 1078,2336 1149,2265 1427,2265 2301,1391 4294,1391 4311,1408 4311,1631 4357,1677 U8.17
X_PWM_1: CR1.13 D4.2 D8.1 P13.1 | length 5698.2
  Top Layer w50: D4.2@2928.61,3565 3033,3565 ; D8.1@3137.39,3565 3033,3565 ; CR1.13 4351.17,3704.17 4337.03,3704.17 4333.86,3701 3743,3701 3518,3476 3062.29,3476 3033,3505.29 3033,3565
  Bottom Layer w50: P13.1 1676.78,3523 1900,3746.22 1900,4227.71 1929.29,4257 3748,4257 3948,4057 4217.71,4057 4247,4027.71 4247,3758 4297,3708 CR1.13
X_PWM_2: CR1.14 D5.2 D9.1 P13.6 | length 6864.6
  Top Layer w50: D5.2@2928.61,3387 3033,3387 ; D9.1@3137.39,3387 3033,3387 ; CR1.14 4431,3534 3755,3534 3524,3303 3067.29,3303 3033,3337.29 3033,3387
  Bottom Layer w50: P13.6 1431.71,2773 1461,2802.29 1461,3392.71 1492.29,3424 1670.78,3424 1976,3729.22 1976,4165.71 2005.29,4195 3691,4195 3918,3968 4136.71,3968 4166,3938.71 4166,3700 4337,3529 4486,3529 4551.87,3594.87 4551.87,3654.87 CR1.14
Y_ENC_A: P12.3 U8.16 | length 7286
  Bottom Layer w10: P12.3 1226,4199 1184,4157 1184,3519 1257,3446 1383.93,3446 1409,3420.93 1409,2858.86 1403.14,2853 1275,2853 1260.66,2838.66 1260.66,2722.34 1276.34,2706.66 1447.66,2706.66 1511,2770 1511,3297 1582,3368 1741,3368 2201,3828 2299.28,3828 2311,3816.28 2311,2771 3184,1898 4208,1898 4329,1777 U8.16
Y_ENC_B: P12.4 U8.15 | length 7027.5